# EAGLE board ir3 (EAGLE 5.06)
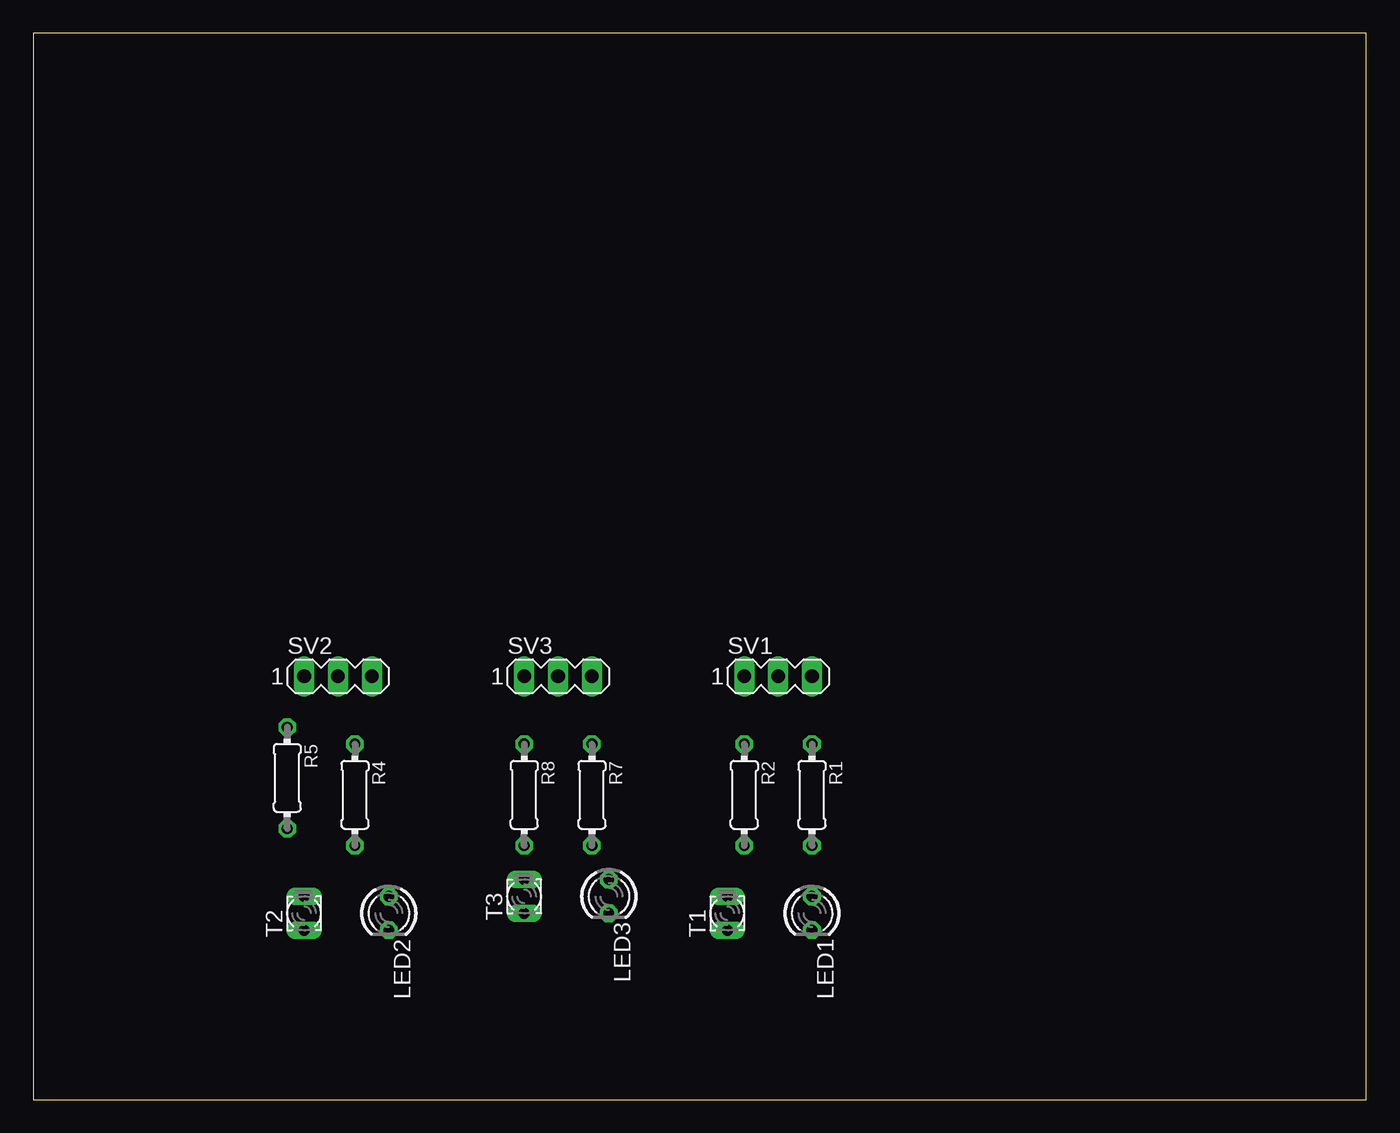
[diagram p0: board, top side]
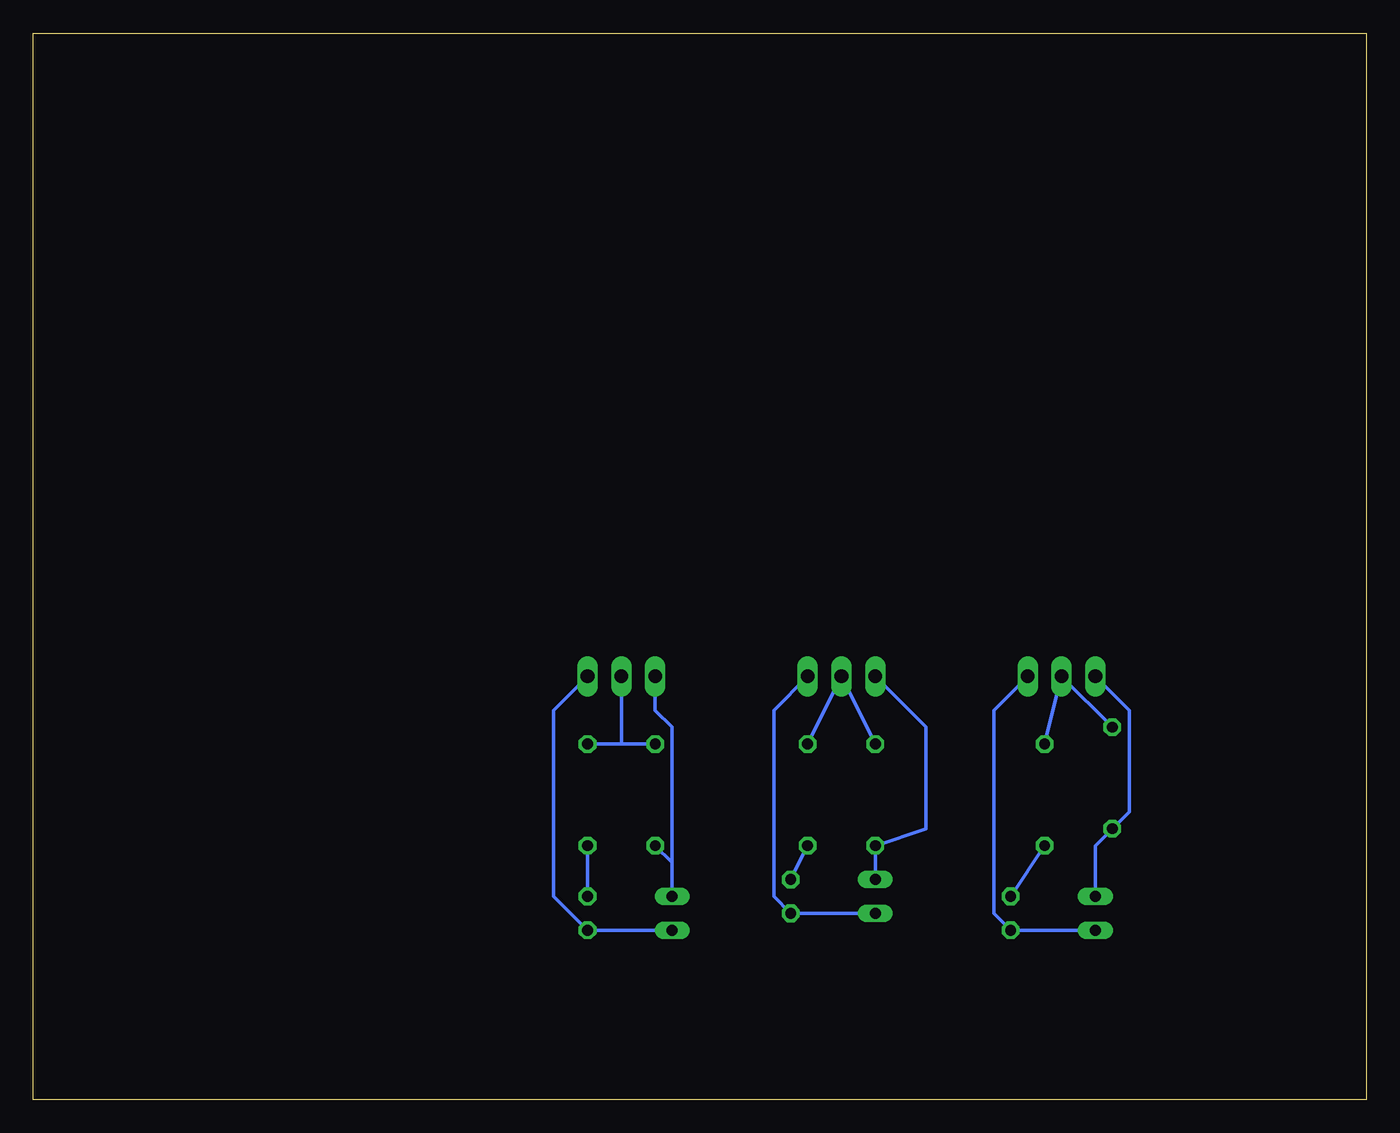
[diagram p1: board, bottom side, seen from below]

Size 100 x 80 mm. Coordinates in mm from the lower left corner, seen from the top.
Outline: 0,0 100,0 100,80 0,80 0,0
Copper layers (1*16): Top 0.035mm / dielectric 1.5mm / Bottom 0.035mm
Design rules "default": minimum track width 10mil, minimum drill 24mil, track to track 8mil, track to pad 8mil, pad to pad 8mil, via to via 8mil, smd to smd 8mil, copper to edge 40mil, drill to drill 8mil, minimum pad ring 10mil, minimum via ring 8mil, stop-mask expansion 4mil, vias tented up to drill 0mil, thermal gap 10mil

## Footprints (pad centres in the part's own frame; a part is rotated, then mirrored left to right if it is on the bottom)
LED3MM = drill 0.813 octagon: A -1.27,0; K 1.27,0
0204/7 = drill 0.813 octagon: 1 -3.81,0; 2 3.81,0
MA03-1 = drill 1.016 long: 1 -2.54,0; 2 0,0; 3 2.54,0
BPX81 = drill 0.813 long: C 1.27,0; E -1.27,0

## Placement (x,y rotation side)
LED1  [LED3MM]  58.42,13.97 270 top
LED2  [LED3MM]  26.67,13.97 270 top
LED3  [LED3MM]  43.18,15.24 270 top
R1  [0204/7]  58.42,22.86 270 top
R2  [0204/7]  53.34,22.86 270 top
R4  [0204/7]  24.13,22.86 270 top
R5  [0204/7]  19.05,24.13 270 top
R7  [0204/7]  41.91,22.86 270 top
R8  [0204/7]  36.83,22.86 270 top
SV1  [MA03-1]  55.88,31.75 0 top
SV2  [MA03-1]  22.86,31.75 0 top
SV3  [MA03-1]  39.37,31.75 0 top
T1  BPX81  [BPX81]  52.07,13.97 90 top
T2  BPX81  [BPX81]  20.32,13.97 90 top
T3  BPX81  [BPX81]  36.83,15.24 90 top

## Library data of the parts
LED1-LED3 = led
R1 R2 R4 R5 R7 R8 = resistor
SV1-SV3 = con-lstb
T1-T3 = opto-trans-siemens

## Nets
N$1: R4.1 R5.1 SV2.2
N$2: R2.2 SV1.1 T1.C
N$3: LED1.A R1.2
N$4: R1.1 R2.1 SV1.2
N$5: LED3.K SV3.3 T3.E
N$6: LED2.K SV2.3 T2.E
N$7: R5.2 SV2.1 T2.C
N$8: LED2.A R4.2
N$9: LED1.K SV1.3 T1.E
N$12: R8.2 SV3.1 T3.C
N$13: LED3.A R7.2
N$15: R7.1 R8.1 SV3.2

## Tracks (layer width: path | path; a pad name or v marks a point on that pad's centre or on a via)
N$1
  Bottom 0.254: R4.1 SV2.2 R5.1
N$2
  Bottom 0.254: T1.C 52.07,17.78 | 52.07,17.78 R2.2 | SV1.1 53.34,29.21 52.07,27.94 52.07,17.78
N$3
  Bottom 0.254: LED1.A R1.2
N$4
  Bottom 0.254: 55.88,26.67 R1.1 | R2.1 55.88,26.67 | 55.88,26.67 SV1.2
N$5
  Bottom 0.254: T3.E LED3.K 44.45,15.24 44.45,29.21 SV3.3
N$6
  Bottom 0.254: T2.E LED2.K 27.94,13.97 27.94,29.21 SV2.3
N$7
  Bottom 0.254: T2.C 20.32,19.05 R5.2 17.78,21.59 17.78,29.21 SV2.1
N$8
  Bottom 0.254: LED2.A R4.2
N$9
  Bottom 0.254: T1.E LED1.K 60.96,15.24 60.96,29.21 SV1.3
N$12
  Bottom 0.254: T3.C R8.2 33.02,20.32 33.02,27.94 SV3.1
N$13
  Bottom 0.254: LED3.A R7.2
N$15
  Bottom 0.254: R8.1 SV3.2 R7.1